# Altium PCB PCB1.PcbDoc (part 2 of 2)
Units mm, origin at the board's own origin, x right, y up, seen from the top; angles counter-clockwise.
Board outline 62 x 97.84 mm, 6 copper layers (Top Layer, +5V, Signal Layer 1, Signal Layer 2, +3.3V, Bottom Layer), stack 1.231 mm thick; 91 components, 73 nets, 358 pads, 48 vias.
Unrouted connection lines stored in the file: 110.
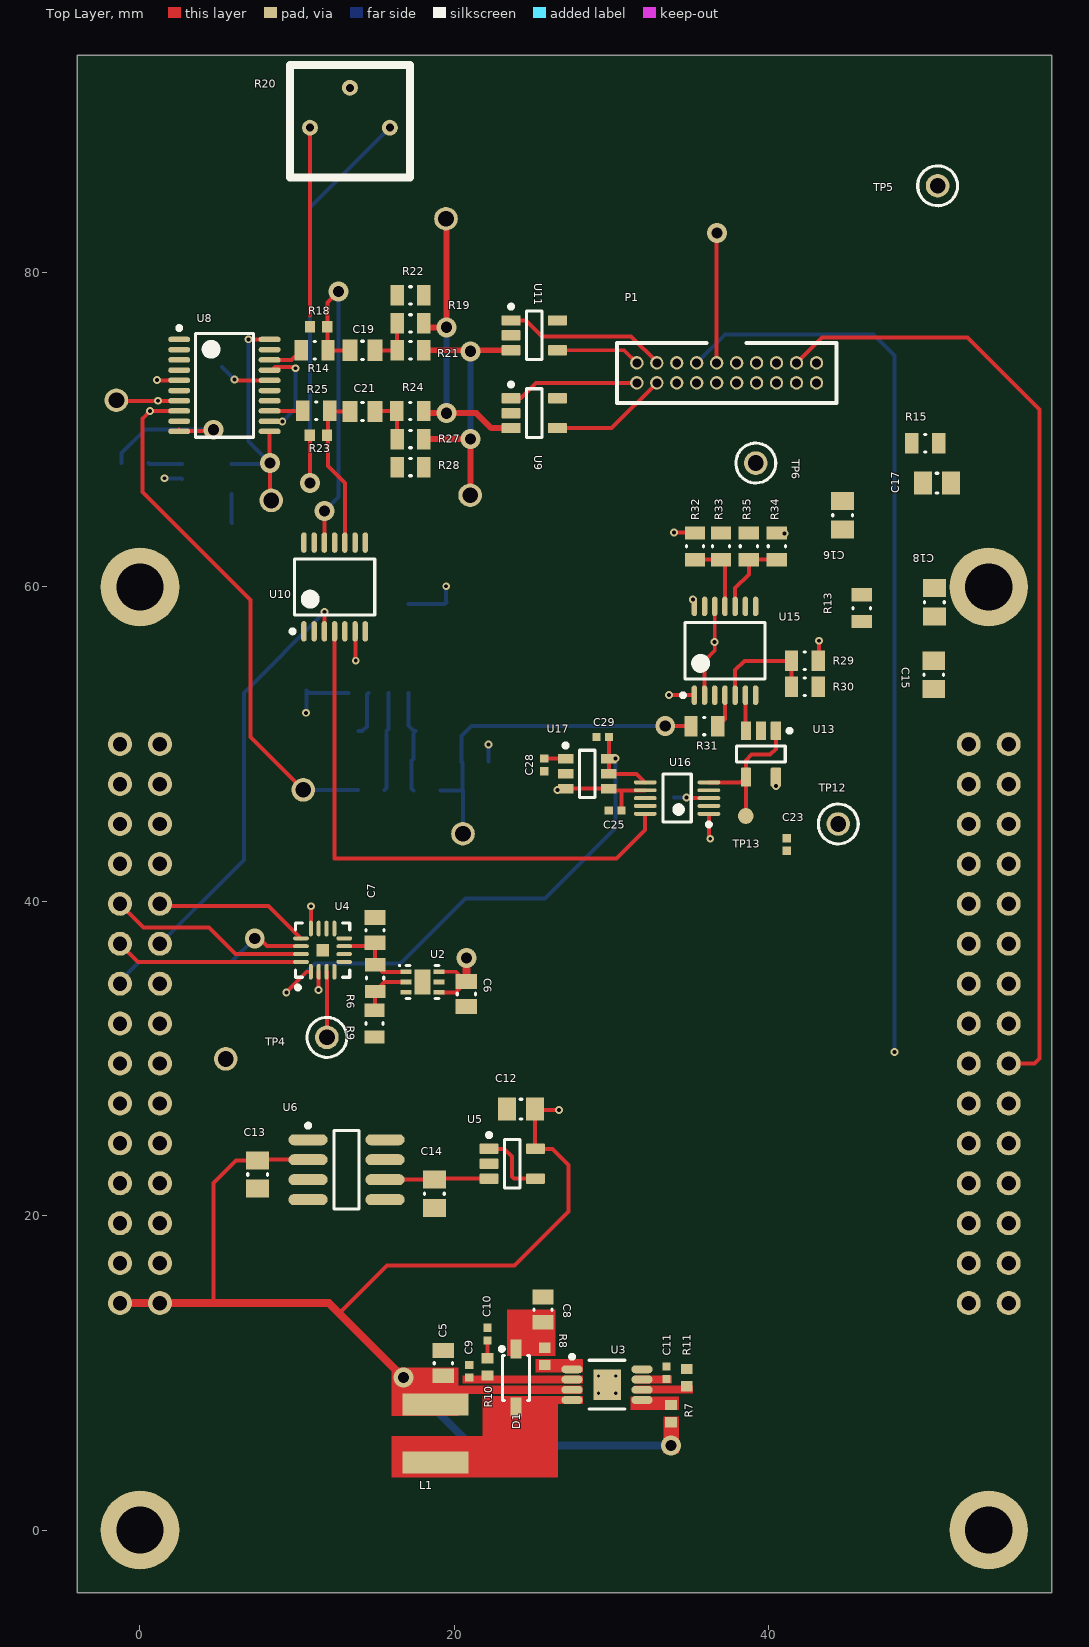
[diagram p0: Top Layer view]

## Part data (continued)
U15: library part CMP-0793-00109-1, "Low Capacitance, Low Charge Injection, +/-15 V / +12 V, 4:1 iCMOS Multiplexer, 120 Ohm Ron, 14-pin SOP (RU-14), Reel", Base Part Number=MAX11100, Manufacturer="Maxim Integrated", Manufacturer Part Number=MAX11100EUB+, Operating Temperature="-40°C ~ 85°C", Package / Case="10-TFSOP, 10-MSOP (0.118\", 3.00mm Width)", Supplier Device Package=10-uMAX, Supplier Part Number 1=MAX11100EUB+-ND, Voltage - Supply, Analog=5V, Voltage - Supply, Digital="2.7 V ~ 5.25 V", Architecture=SAR, Category="Integrated Circuits (ICs)", ComponentLink1Description=https://datasheets.maximintegrated.com/en/ds/MAX11100.pdf, ComponentLink1URL=https://datasheets.maximintegrated.com/en/ds/MAX11100.pdf, Configuration=S/H-ADC, Data Interface=SPI, Features=-, Input Type="Single Ended", Number of Bits=16, Number of Inputs=1, Packaging=Tube, Part Status=Active, Pricing 1="1=5.98, 10=5.855 (USD)", Ratio - S/H:ADC=1:1, Reference Type=External, RoHS="RoHS Compliant", Sampling Rate (Per Second)=200k, Stock 1=927, Supplier 1=Digi-Key
U16: library part CMP-0249-00017-1, "16-Bit, +5V, 200ksps ADC with 10uA Shutdown, 10-Pin uMAX, -40°C to +85°C, Pb-Free, Tape and Reel", Base Part Number=MAX11100, Manufacturer="Maxim Integrated", Manufacturer Part Number=MAX11100EUB+, Operating Temperature="-40°C ~ 85°C", Package / Case="10-TFSOP, 10-MSOP (0.118\", 3.00mm Width)", Supplier Device Package=10-uMAX, Supplier Part Number 1=MAX11100EUB+-ND, Voltage - Supply, Analog=5V, Voltage - Supply, Digital="2.7 V ~ 5.25 V", Architecture=SAR, Category="Integrated Circuits (ICs)", ComponentLink1Description=https://datasheets.maximintegrated.com/en/ds/MAX11100.pdf, ComponentLink1URL=https://datasheets.maximintegrated.com/en/ds/MAX11100.pdf, Configuration=S/H-ADC, Data Interface=SPI, Features=-, Input Type="Single Ended", Number of Bits=16, Number of Inputs=1, Packaging=Tube, Part Status=Active, Pricing 1="1=5.98, 10=5.855 (USD)", Ratio - S/H:ADC=1:1, Reference Type=External, RoHS="RoHS Compliant", Sampling Rate (Per Second)=200k, Stock 1=927, Supplier 1=Digi-Key
U17: "IC VREF SERIES 4.096V SOT23", Current - Supply=350µA, Manufacturer="Maxim Integrated", Operating Temperature="-40°C ~ 125°C (TA)", Package / Case=SOT-23-6, Supplier Part Number 1=MAX6070AAUT41+TCT-ND, Temperature Coefficient=6ppm/°C, Tolerance=±0.04%, Voltage - Input="4.3 V ~ 5.5 V", Voltage - Output (Min/Fixed)=4.096V, Category="Integrated Circuits (ICs)", ComponentLink1Description=https://datasheets.maximintegrated.com/en/ds/MAX6070-MAX6071.pdf, ComponentLink1URL=https://datasheets.maximintegrated.com/en/ds/MAX6070-MAX6071.pdf, Manufacturer Part Number=MAX6070AAUT41+T, Mounting Type="Surface Mount", Noise - 0.1Hz to 10Hz=9.6µVp-p, Noise - 10Hz to 10kHz=9µVrms, Output Type=Fixed, Packaging="Cut Tape (CT)", Part Status=Active, Pricing 1="1=3.41, 10=3.213, 25=2.5704, 50=2.4418, 100=2.2491, 250=2.13344, 500=2.05634 (USD)", Reference Type=Series, RoHS="RoHS Compliant", Stock 1=2623, Supplier 1=Digi-Key, Supplier Device Package=SOT-23-6

## Free pads (board coordinates)
  round 5 hole 3: ""(0,0) ""(0,60) ""(54,0) ""(54,60)

## Via types
v1: diameter 0.5, hole 0.25, Top Layer to Bottom Layer, 29 vias
v2: diameter 1.27, hole 0.711, Top Layer to Bottom Layer, 15 vias
v3: diameter 0.5, hole 0.2, Top Layer to Bottom Layer, 4 vias

## Nets (pads, with @x,y where several pads share a name; then routed paths per layer and width w, separated by ;. In a path a pad name is that pad's centre, name@x,y a point inside that pad or via, vN(x,y) a via of type N, cw(c..) or ccw(c..) an arc to the next point about the centre after c; other vN are vias at no path point)
+3.3: C15.1 C26.2 P2.6 P3.25 U4.12 U7.5 U10.1 U16.3 | length 4.8
  Top Layer w0.254: U4.12 v1(10.871,39.688) ; v1(34.773,46.609) 34.816,46.565 U16.3
  Bottom Layer w0.254: v1(1.563,66.917) 1.588,66.891 2.655,66.891 U7.5 ; C26.2@33.966,46.609 v1(34.773,46.609)
+5: C2.1 C6.2 C23.2 C25.2 P1.4 P2.2 P3.22 R2.2 U1.8 U2.4 U2.6 U13.5 U15.2 U15.12 U16.7 U17.3 U17.4 | length 22.4
  Top Layer w0.254: U2.4 20.077,34.212 C6.2 20.727,34.9 20.108,35.519 19.028,35.519 U2.6 ; U17.3 U17.4 29.929,47.065 U16.7 ; C25.2 30.626,47.046 ; U15.2 35.918,55.299 36.568,55.949 U15.12
  Top Layer w0.5: C6.2 v2(20.765,36.386)
  Bottom Layer w0.254: U1.8 19.388,58.907 C2.1 19.482,59.027 v1(19.482,60.046) ; R2.2@22.174,48.881 v1(22.174,49.987)
  other v1: 26.568,47.092 40.457,47.326 36.564,56.503
"+5 BBB": P3.1
+5.5: C7.2 R6.1 U2.1 U4.7 | length 5.2
  Top Layer w0.254: U4.7 14.627,37.144 C7.2@14.631,37.148 ; C7.2 R6.1 15.415,35.512 U2.1
+5R: R13.1 R34.2 U5.1 U5.4 | length 4.5
  Top Layer w0.254: U5.1 23.168,24.255 23.661,23.762 23.661,22.492 23.798,22.355 U5.4
  other v1: 41.009,63.412
+5R_Reduced: R34.1 R35.2 U15.10 | length 5.1
  Top Layer w0.254: U15.10 37.868,59.929 38.742,60.803 R35.2 R34.1
+12: C5.2 C12.2 C13.1 C17.1 C18.2 C20.2 L1.1 P1.10 P2.14 P3.29 P3.30 R7.1 U3.3 U5.5 U6.2 U8.16 U9.5 U11.5 | length 83.1
  Top Layer w0.254: 4.687,14.542 4.687,22.086 6.12,23.519 C13.1 7.521,23.559 U6.2 ; v1(6.022,73.191) 6.066,73.146 U8.16 ; 12.62,13.839 12.721,13.839 15.723,16.84 23.825,16.84 27.254,20.269 27.254,23.236 26.236,24.255 U5.5 ; U5.5@25.145,24.271 C12.2 ; C12.2@25.196,26.734 v1(26.653,26.734)
  Top Layer w0.5: P3.29 P3.30 12.019,14.44 12.62,13.839 v2(16.759,9.699)
  Bottom Layer w0.254: C20.2@5.208,74.005 v1(6.022,73.191)
  Bottom Layer w0.5: v2(16.759,9.699) 21.077,5.381 v2(33.777,5.381)
-5: C3.1 C16.1 P1.3 P2.18 P3.26 U1.4 U8.5 | length 115.9
  Top Layer w0.254: v1(1.08,73.165) 1.099,73.146 U8.5 ; P1.3 43.383,75.87 52.654,75.87 57.226,71.298 57.226,29.997 56.909,29.68 P2.18
  Signal Layer 1 w0.254: P3.26 -0.038,20.828 -2.21,20.828 -2.972,21.59 -2.972,51.714 -2.692,51.994 v1(10.566,51.994)
  Bottom Layer w0.254: v1(10.566,51.994) 10.605,52.032 C3.1 10.752,53.257 U1.4
"ADC REF": C29.1 U4.1 U16.6 U17.5 U17.6 | length 36.7
  Top Layer w0.254: v1(9.31,34.202) 9.31,34.237 10.591,35.519 U4.1 ; U17.6 U17.5 31.596,48.114 U16.6 ; U17.6@29.839,49.073 C29.1
  Bottom Layer w0.254: v1(9.31,34.202) 11.151,36.043 16.561,36.043 20.701,40.183 25.756,40.183 30.251,44.679 v1(30.251,49.098)
Analog_Mux_Out: U13.3 U15.6 | length 2.3
  Top Layer w0.254: U15.6 38.518,50.884 U13.3
Batt_1_Stat: P2.7
Batt_2_Stat: P2.9
Battery_1: P2.12
Battery_2: P2.16
BBB_PWR_SW: P3.3
BEAM: P1.11 TP8.1 U8.7 | length 65.4
  Top Layer w0.254: TP8.1 -1.463,71.846 v1(1.156,71.846) U8.7 ; v2@36.678,82.55 36.691,82.537 P1.11
  Signal Layer 1 w0.254: TP8.1 -1.499,83.947 1.245,86.69 32.537,86.69 v2(36.703,82.525)
"Beam Sync Demod Out": C4.2 R2.1 R4.1 R31.2 TP1.1 | length 22.5
  Top Layer w0.254: v2(33.42,51.151) R31.2
  Bottom Layer w0.254: R4.1 C4.2 ; TP1.1 20.55,47.015 C4.2 ; v2(33.42,51.151) 21.103,51.151 20.462,50.51 R2.1 20.512,48.819 C4.2
Beam_mod: R3.2 TP2.1 U8.8 | length 33.8
  Top Layer w0.254: U8.8 0.66,71.196 v1(0.648,71.184) 0.167,70.703 0.167,66.04 7.037,59.17 7.037,50.444 TP2.1
  Bottom Layer w0.254: TP2.1 R3.2
CT_CS0: P1.5 P3.14
CT_MUX_A0: P1.12 P2.24
CT_MUX_A1: P1.14 P2.22
DAC0_OUT: U4.2 | length 1.2
  Top Layer w0.254: v1@11.371,34.358 U4.2
  other v1: 11.367,34.354
DAC1_OUT: R15.1 TP4.1 U4.3 | length 4.2
  Top Layer w0.254: U4.3 11.894,35.496 TP4.1
DAC_CS0: P3.10 U4.13 | length 9.7
  Top Layer w0.254: P3.10@1.41,39.7 8.19,39.7 U4.13
DPOT_CS0: P3.12 U10.3 | length 26.7
  Top Layer w0.254: U10.3 11.741,57.183 11.741,58.4 v1(11.748,58.408)
  Bottom Layer w0.254: P3.12 6.607,42.637 6.607,53.267 11.672,58.332 v1@11.672,58.433
FB_CS0: P3.6 U16.9
FB_MUX_A0: P2.25 U15.14
  other v1: 35.173,59.213
FB_MUX_A1: P2.27 U15.1 | length 1.6
  Top Layer w0.254: v1(33.668,53.125) 33.679,53.113 U15.1
GND: C2.2 C3.2 C4.1 C5.1 C6.1 C7.1 C8.1 C9.1 C10.1 C11.1 C12.1 C13.2 C14.2 C15.2 C16.2 C17.2 C18.1 C20.1 C23.1 C25.1 C26.1 C28.1 C29.2 P1.1 P1.2 P2.4 P2.23 P2.28 P3.2 P3.19 P3.20 P3.21 P3.23 P3.24 P3.27 P3.28 R5.1 R9.2 R11.2 R12.2 R20.2 R22.1 R28.1 R30.1 R33.1 R35.1 TP5.1 U2.3 U2.7 U3.8 U3.9 U4.6 U4.8 U4.9 U4.10 U4.11 U5.2 U6.4 U7.2 U7.4 U8.6 U8.9 U8.14 U8.19 U9.2 U10.2 U10.11 U10.14 U11.2 U13.2 U15.3 U15.13 U16.2 U16.4 U16.8 U17.2
  other v3: 29.166,8.699 30.266,8.699 29.166,9.799 30.266,9.799
NetC1_1: C1.1 R1.2 R3.1 U1.2 | length 6.1
  Bottom Layer w0.254: R3.1 15.686,47.219 C1.1 ; R1.2@15.685,50.836 15.812,50.963 U1.2 ; C1.1@15.694,48.987 R1.2
NetC1_2: C1.2 R1.1 R4.2 U1.1 | length 6.2
  Bottom Layer w0.254: U1.1 17.096,53.243 17.096,51.17 17.431,50.836 R1.1@17.536,50.836 ; C1.2 17.286,47.181 R4.2 ; C1.2@17.394,49.065 R1.1
NetC9_2: C9.2 R10.1 U3.2
NetC10_2: C10.2 R10.2 | length 1.1
  Top Layer w0.254: R10.2 C10.2
NetC11_2: C11.2 U3.7
NetC14_1: C14.1 U5.3 U6.6 | length 6.6
  Top Layer w0.254: U6.6 15.606,22.3 C14.1 ; C14.1@18.788,22.355 U5.3
NetC19_1: C19.1 R19.2 R21.2 R22.2 | length 3.1
  Top Layer w0.254: C19.1 R21.2 R19.2
NetC19_2: C19.2 R14.1 R18.2 U10.12 | length 21.8
  Top Layer w0.254: U10.12 v2(11.733,64.834) ; v2(12.637,78.804) 11.917,78.084 11.917,77.28 11.917,75.103 R14.1 C19.2
  Bottom Layer w0.254: v2(11.733,64.834) 12.637,65.738 v2(12.637,78.804)
NetC21_1: C21.1 R24.2 R27.2 R28.2 | length 3.1
  Top Layer w0.254: C21.1 14.987,71.196 R24.2 16.348,69.544 R27.2@16.359,69.533
NetC21_2: C21.2 R23.1 R25.2 U10.10 | length 10.2
  Top Layer w0.254: U10.10 13.033,66.612 11.963,67.682 11.963,71.196 11.989,71.17 C21.2
NetC28_2: C28.2 U17.1 | length 1.4
  Top Layer w0.254: C28.2 25.726,49.072 27.073,49.072 U17.1
NetD1_1: D1.1 L1.2 U3.4
NetP2_13: P2.13
NetR5_2: R5.2 U1.3 | length 2.8
  Bottom Layer w0.254: R5.2 14.132,50.836 14.43,51.134 14.43,53.145 U1.3
NetR6_2: R6.2 R9.1 U2.2 | length 3.4
  Top Layer w0.254: R9.1 14.961,33.108 R6.2 15.557,34.862 U2.2
NetR7_2: R7.2 U3.5
NetR8_1: R8.1 U3.1
NetR11_1: R11.1 U3.6
NetR12_1: R12.1 U7.3 | length 1.9
  Bottom Layer w0.254: U7.3 5.83,64.109 R12.1
NetR13_2: R13.2 R15.2 U8.12 U8.17 | length 6.4
  Top Layer w0.254: U8.12 8.271,70.524 v1(9.056,70.524) ; U8.17 8.32,73.724 8.591,73.994 9.826,73.994 v1(9.906,73.914)
  Bottom Layer w0.254: v1(9.056,70.524) 9.906,71.374 v1(9.906,73.914)
NetR14_2: R14.2 U8.18 | length 2.3
  Top Layer w0.254: U8.18 9.652,74.446 R14.2
NetR18_1: R18.1 R20.1 | length 11.9
  Top Layer w0.254: 10.817,77.28 R20.1
NetR20_3: R20.3 R23.2 | length 27.7
  Top Layer w0.254: v2(10.817,66.612) R23.2@10.817,69.647
  Bottom Layer w0.254: v2(10.817,66.612) 10.817,84.138 R20.3
NetR25_1: R25.1 U8.13 | length 2
  Top Layer w0.254: U8.13 R25.1@10.263,71.196
NetR31_1: R31.1 TP12.1 U15.4 | length 2.2
  Top Layer w0.254: R31.1 37.218,51.61 U15.4
NetTP13_1: TP13.1 U13.1 U13.4 U16.5 | length 9.4
  Top Layer w0.254: U16.5 38.221,47.565 U13.4 ; TP13.1 38.554,45.438 U13.4 ; U13.1 40.454,49.7 40.081,49.327 38.913,49.327 38.554,48.968 U13.4
PLATE_N: R19.1 R24.1 TP9.1 U9.3 | length 19.7
  Top Layer w0.381: R24.1 18.187,71.057 v2(19.495,71.057) ; R19.1 18.313,76.518 v2(19.495,76.518) 19.495,83.401 TP9.1 ; v2@19.737,71.057 21.4,71.057 22.35,70.107 U9.3
  Bottom Layer w0.381: v2(19.495,71.057) v2(19.495,76.518)
PLATE_N_F: P1.20 U9.1 | length 8.4
  Top Layer w0.254: U9.1 24.23,72.007 25.21,72.987 P1.20
PLATE_N_S: P1.18 U9.4 | length 7.5
  Top Layer w0.254: U9.4 30,70.107 P1.18
PLATE_P: R21.1 R27.1 TP10.1 U11.3 | length 17.7
  Top Layer w0.381: R27.1 v2(21.019,69.406) 21.019,65.85 TP10.1 ; R21.1 18.062,75.06 U11.3
  Bottom Layer w0.381: v2(21.019,69.406) v2(21.019,74.994)
PLATE_P_F: P1.17 U11.1 | length 10.4
  Top Layer w0.254: U11.1 24.565,76.96 25.591,75.934 31.255,75.934 32.881,74.308 P1.17
PLATE_P_S: P1.19 U11.4 | length 5.4
  Top Layer w0.254: U11.4 30.808,75.06 P1.19
PWM1A: P1.13 P3.7 TP11.1 | length 118.6
  Signal Layer 1 w0.254: P3.7 -1.27,41.961 -0.279,40.97 2.845,40.97 5.461,38.354 TP11.1 47.574,29.972 v1(48.006,30.404)
  Signal Layer 2 w0.254: P3.7 P3.7@-0.635,42.38
  Bottom Layer w0.254: P1.13 37.236,76.073 46.66,76.073 48.006,74.727 v1(48.006,30.404)
PWM2A: P2.17
PWM2B: P2.21 TP7.1 U7.1 U8.11 U8.20 | length 16.7
  Top Layer w0.254: v1(6.897,75.756) 8.238,75.756 U8.20 ; U8.11 8.248,67.902 v2(8.268,67.882) 8.268,65.595 TP7.1
  Bottom Layer w0.254: U7.1 8.202,67.816 v2(8.268,67.882) 6.897,69.254 v1(6.897,75.756)
PWM2B_DELAY: P1.8 R17.2 TP6.1 U7.6 | length 2.2
  Bottom Layer w0.254: R17.2@0.533,67.882 0.599,67.816 U7.6
SPI0_MISO: P1.9 P3.11 U4.16 U10.6 U16.1 | length 118.4
  Top Layer w0.254: P3.11 -0.114,36.144 U4.16 ; U10.6 13.701,57.157 13.701,55.337 v1(13.729,55.309) ; v1@36.195,44.07 U16.1
  Signal Layer 2 w0.254: P3.11 -0.231,36.261 1.7,36.261 7.612,42.172 ; v1(13.729,55.309) 13.729,48.29 7.612,42.172 ; P1.9 35.637,76.581 30.251,76.581 28.88,75.209 28.88,53.238 32.055,50.063 32.055,45.999 34.074,43.981 v1(36.284,43.981) 34.476,42.172 7.612,42.172
SPI0_MOSI: P3.9 U4.15 U10.5 | length 12.8
  Top Layer w0.254: P3.9 0.231,38.339 4.377,38.339 6.072,36.644 U4.15
SPI0_SCLK: P1.7 P3.13 U4.14 U10.4 U16.10 | length 131.9
  Top Layer w0.254: v2(7.303,37.644) 7.578,37.644 8.078,37.144 U4.14 ; U10.4 12.383,42.724 30.329,42.724 32.145,44.541 U16.10
  Signal Layer 1 w0.254: v2(7.303,37.644) 12.217,42.558 12.217,57.379 12.7,57.861 12.7,70.261 7.424,75.538 7.424,79.331 9.208,81.115 34.837,81.115 39.243,76.709 P1.7@39.243,74.257
  Bottom Layer w0.254: P3.13 -1.27,34.925 -0.063,36.132 5.791,36.132 v2(7.303,37.644)
Sync_clk: P1.6 R17.1 U8.10 | length 9.4
  Top Layer w0.254: U8.10 U8.10@2.498,70.002 ; U8.10@2.498,69.941 2.524,69.915 4.586,69.915 v2(4.674,70.002)
  Bottom Layer w0.254: R17.1@-1.167,67.882 -1.167,68.513 0.322,70.002 v2(4.674,70.002)
ZH: P1.16 R29.2 | length 21.4
  Top Layer w0.254: R29.2 43.193,55.348 v1(43.193,56.579)
  Signal Layer 2 w0.254: P1.16 34.151,65.621 v1(43.193,56.579)
ZH_Reduced: R29.1 R30.2 U15.5 | length 7.1
  Top Layer w0.254: U15.5 37.868,54.722 38.449,55.303 R29.1 R30.2
ZP: C8.2 D1.2 P1.15 R8.2 R32.2 | length 22.2
  Top Layer w0.254: v1(33.985,63.475) 35.27,63.475 R32.2
  Signal Layer 1 w0.254: v1(33.985,63.475) 29.007,68.453 29.007,75.311 29.896,76.2 33.299,76.2 34.151,75.349 P1.15
ZP_Reduced: R32.1 R33.2 U15.11 | length 4.7
  Top Layer w0.254: R32.1 R33.2 37.218,61.477 U15.11
pads on no net: P2.1 P2.3 P2.5 P2.8 P2.10 P2.11 P2.15 P2.19 P2.20 P2.26 P2.29 P2.30 P3.4 P3.5 P3.8 P3.15 P3.16 P3.17 P3.18 U1.5 U1.6 U1.7 U2.5 U4.4 U4.5 U4.17 U6.1 U6.3 U6.5 U6.7 U6.8 U8.1 U8.2 U8.3 U8.4 U8.15 U10.7 U10.8 U10.9 U10.13 U15.7 U15.8 U15.9
copper on no net: | length 19.1
  Signal Layer 1 w0.254: 15.38,38.037 24.651,38.037 31.585,44.971

## Polygon pours and split planes (outlines as drawn)
GND on Top Layer "Top_GND" (solid, shelved, pour order 0): -30.67,-97.008 -30.67,-195.008 31.33,-195.008 31.33,-97.008
GND on Bottom Layer "Bottom_GND" (solid, shelved, pour order 2): -30.67,-97.008 -30.67,-195.008 31.33,-195.008 31.33,-97.008
GND on Signal Layer 1 "GND" (solid, shelved, pour order 8): -3.81,93.98 -3.81,-3.81 57.785,-3.81 57.785,93.98
GND on Signal Layer 1 "Top_GND" (solid, shelved, pour order 4): -30.67,-97.008 -30.67,-195.008 31.33,-195.008 31.33,-97.008
GND on Signal Layer 2 "Top_GND" (solid, shelved, pour order 6): -30.67,-97.008 -30.67,-195.008 31.33,-195.008 31.33,-97.008
+5 on +5V (split plane): 57.49,93.33 57.49,-3.492 -3.492,-3.492 -3.492,93.33
+3.3 on +3.3V (split plane): 57.49,93.33 57.49,-3.492 -3.492,-3.492 -3.492,93.33

## Other copper
Top Layer:
  region net +12: 33.333,4.899 33.333,7.21 34.285,7.21 34.285,4.899
  region net NetR7_2: 31.237,8.48 34.285,8.48 34.285,7.667 31.237,7.667
  region net NetR11_1: 31.491,9.166 35.174,9.166 35.174,8.709 31.491,8.709
  region net NetC11_2: 31.517,9.801 33.828,9.801 33.828,9.344 31.517,9.344
  region net ZP: 26.411,11.096 23.363,11.096 23.363,14.017 26.411,14.017
  region net NetD1_1: 22.893,3.349 16.023,3.349 16.023,5.966 19.922,5.966 22.893,5.966
  region net +12: 20.246,7.261 16.023,7.261 16.023,10.309 20.246,10.309
  region net NetR8_1: 28.164,10.03 25.192,10.03 25.192,10.868 28.164,10.868
  region net NetC9_2: 28.164,9.344 20.544,9.344 20.544,9.801 25.192,9.801 28.164,9.801
  region net NetD1_1: 21.814,8.506 21.814,3.349 26.589,3.349 26.589,8.023 28.164,8.023 28.164,8.506
  region net +12: 28.139,8.683 16.023,8.683 16.023,9.166 25.167,9.166 28.139,9.166

## Silkscreen, mask and mechanical layers (free items; w line width, h text height)
Bottom Overlay:
  circle w0.254: c22.238,2.284 r5
  circle w0.1: c22.238,2.284 r4.663
  lines w0.127: 19.952,0.836 20.714,1.598 20.206,2.36 21.73,1.598 20.714,2.868 22.238,2.106 21.222,3.376 22.746,2.614 21.73,3.884 23.254,3.122 22.238,4.392 23,3.884 23.762,4.646
  lines w0.254: 19.825,0.328 19.825,1.344 ; 19.952,0.836 23.762,0.836 23.762,4.646 ; 23.254,4.773 24.27,4.773
  text "ZH Adjust Pot" at 48.702,91.882 h0.5
  text "TOP" at 26.632,91.352 h1
  text "PWM2B" at -0.356,89.687 h0.5
  text "ZP" at 47.486,88.329 h0.5 r270
  text "ZH" at 53.48,88.1 h0.5 r270
  text "Beam Mod Out" at 31.496,88.036 h0.51
  text "GND" at 50.483,87.745 h0.5 r270
  text "Plate N" at 24.917,83.401 h0.5
  text "Offset / Adjust" at 15.99,81.522 h1
  text "BEAM" at -2.413,74.879 h0.5
  text "Plate P" at 26.035,65.507 h0.5
  text "LM-002" at 39.273,4.594 h1.27
  text "Synch Demod Out" at 6.541,3.62 h0.51
  text "Feedback" at 39.273,2.689 h1.27
  text "REV E" at 39.273,0.784 h1.27
  text "ZLS" at 23.254,-0.764 h1.2
  text "ZLS Corp" at 39.273,-1.121 h1.27
Mechanical 1:
  text "Top faces inward to center of meter" at 26.861,89.218 h0.51

## Dimensions
-1.27,14.44 to 0,0 on Mechanical 13
54,0 to 55.27,14.44 on Mechanical 13
54,60 to 54,0 on Mechanical 13
-4.003,-4.003 to -4.003,93.841 on Mechanical 13